# Altium PCB pocker_ shield_3.pcbdoc
Units mm, origin at the board's own origin, x right, y up, seen from the top; angles counter-clockwise.
Board outline 45 x 90.2 mm, 2 copper layers (Top Layer, Bottom Layer); 7 components, 17 nets, 66 pads, 43 vias.
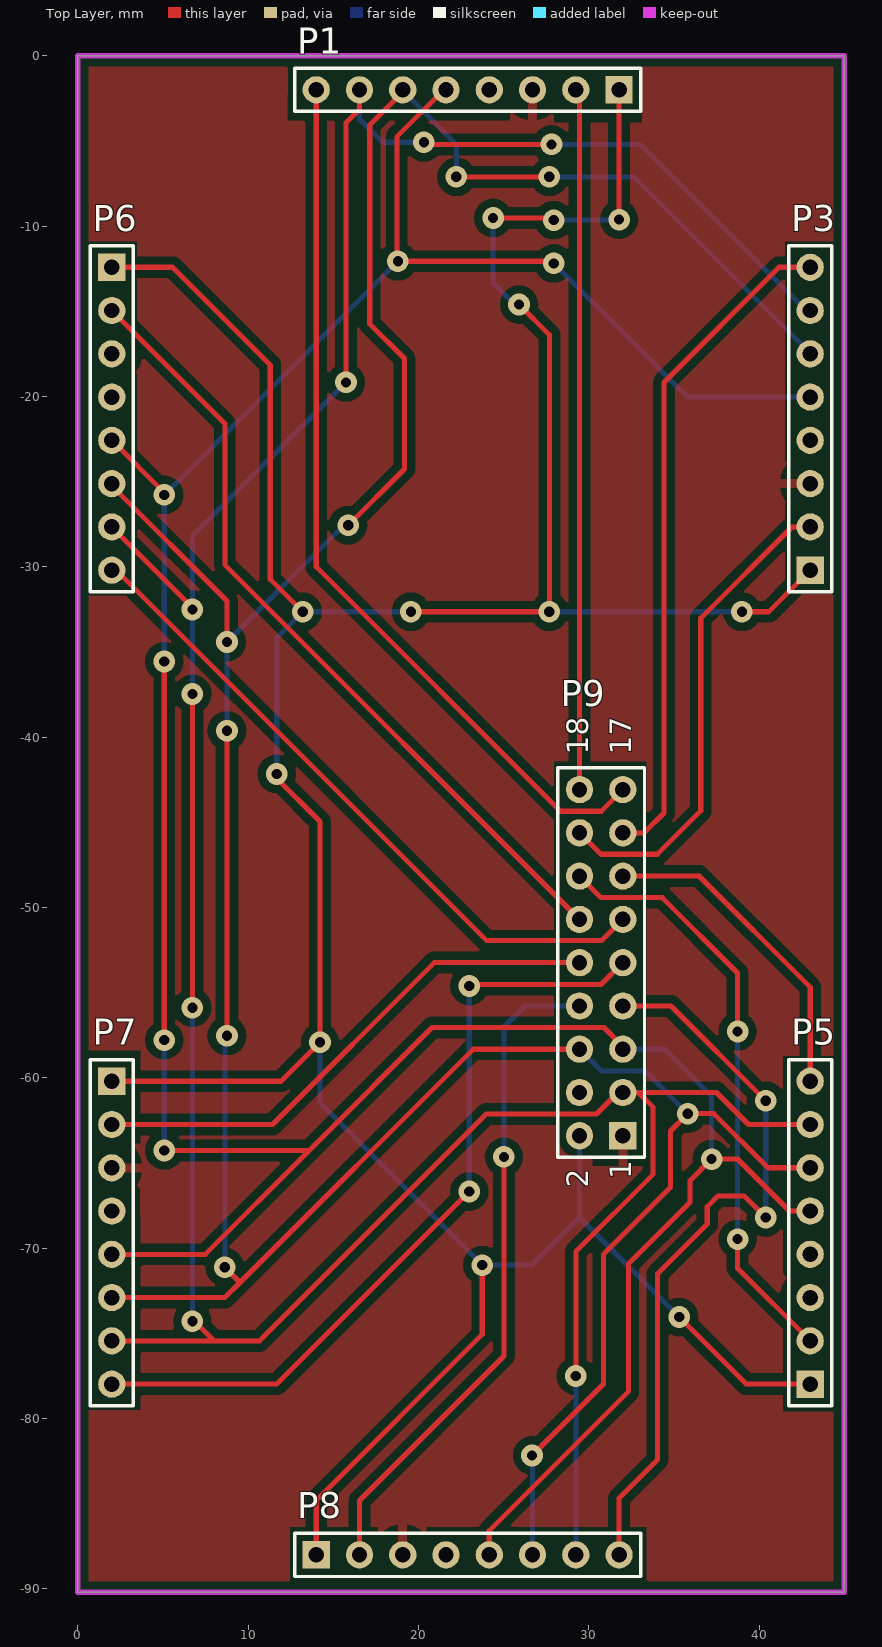
[diagram p0: Top Layer view]
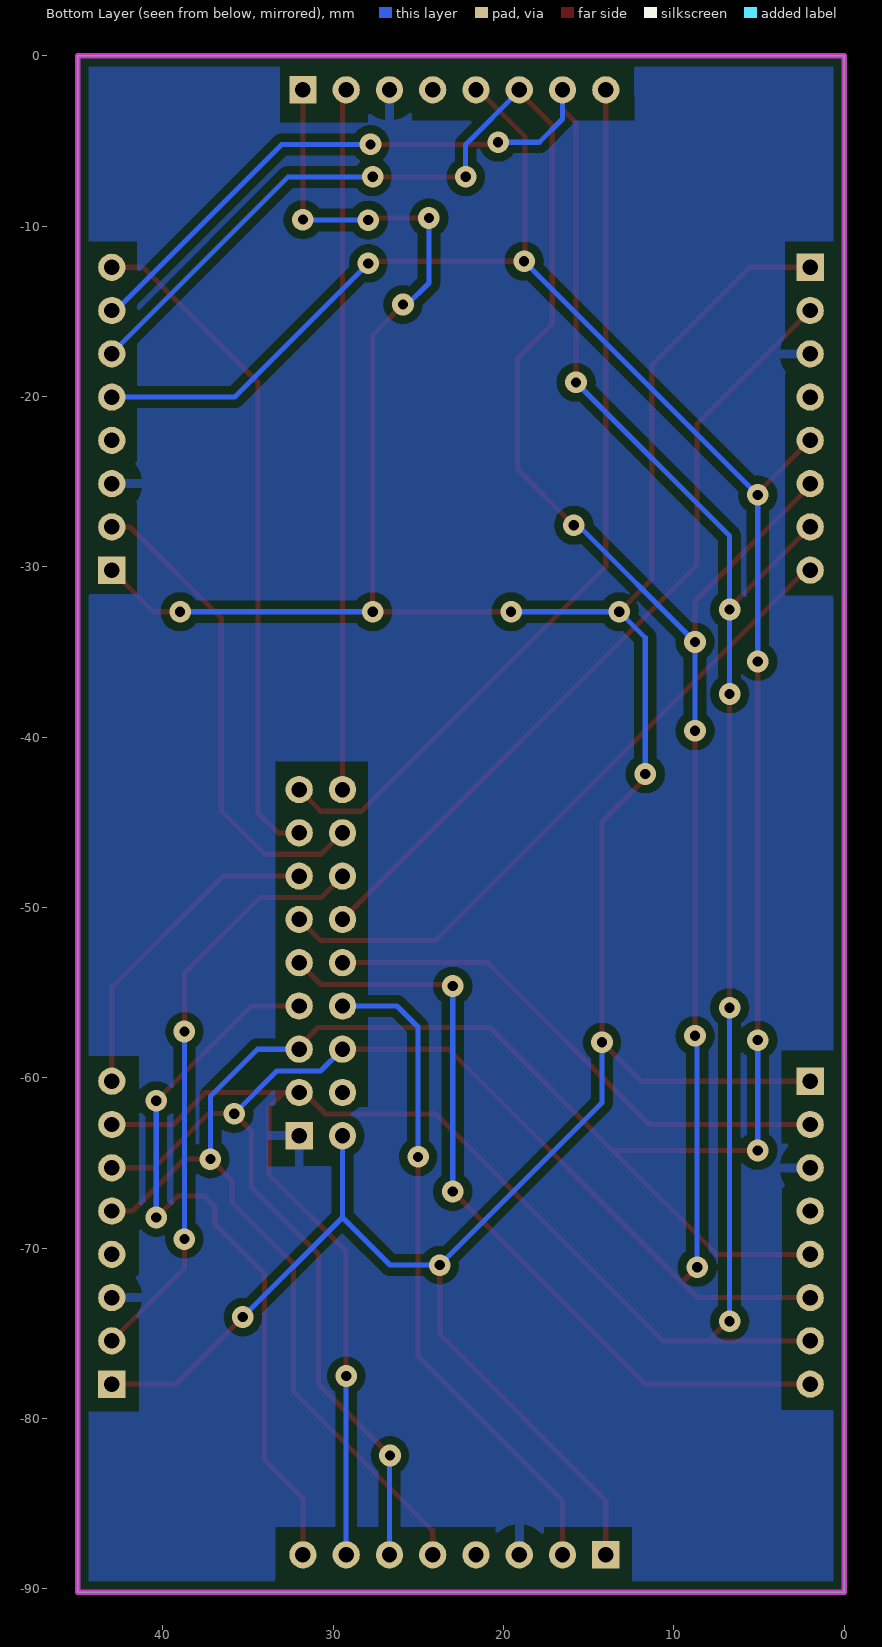
[diagram p1: Bottom Layer view, seen from below]

## Layer stack, top to bottom
Top Solder: solder mask 0.0102, Solder Resist, Dk 3.5
Top Layer: signal copper 0.0356
Dielectric 1: dielectric 0.32, FR-4, Dk 4.8
Bottom Layer: signal copper 0.0356
Bottom Solder: solder mask 0.0102, Solder Resist, Dk 3.5

## Board outline
0,-90.2 0,0 45,0 45,-90.2

## Design rules (kind name [scope] priority, off if disabled: settings)
Clearance [All] p1: gap=0.3
PlaneClearance [All] p1: clearance=0.5
PlaneConnect [All] p1: planeconnectstyle=Relief reliefexpansion=0.508 reliefentries=4 reliefconductorwidth=0.5 reliefairgap=0.5
PolygonConnect [All] p1: connectstyle=Relief reliefconductorwidth=0.5 reliefentries=4 polygonreliefangle="90 Angle" airgapwidth=1
RoutingVias [All] p1: holewidth=0.711 width=1.27 viastyle="Through Hole" minholewidth=0.711 minwidth=1.27 maxholewidth=0.711 maxwidth=1.27
SolderMaskExpansion [All] p1: expansion=0.102
Width [All] p1: maxlimit=0.5 minlimit=0.3 preferedwidth=0.3
27 further rules are at their usual default settings.

## Components (designator, comment, footprint, x,y, rotation, side; value= is the part's Value field where it differs from the comment)
P1 "Header 8" HDR1X8 31.78,-2 r180 top locked
P3 "Header 8" HDR1X8 43,-30.2 r90 top locked
P5 "Header 8" HDR1X8 43,-77.98 r90 top locked
P6 "Header 8" HDR1X8 2,-12.42 r270 top locked
P7 "Header 8" HDR1X8 2,-60.2 r270 top locked
P8 "Header 8" HDR1X8 14,-88 r0 top locked
P9 "Header 9X2" HDR2X9 32,-63.4 r90 top locked

## Footprints (in the part's own frame and the unit in brackets; to place one, negate y for a bottom-side part, rotate by r counter-clockwise, add the part's x,y. Pads: shape width x height; smd on the part's side, far side on the other; paste and mask are expansions set on the pad)
HDR1X8 [mm] "Connector; Header; 8 Position"
  rect 1.6x1.6 hole 0.9: 1(0,0)
  round 1.6 hole 0.9: 2(2.54,0) 3(5.08,0) 4(7.62,0) 5(10.16,0) 6(12.7,0) 7(15.24,0) 8(17.78,0)
  silkscreen extent -1.27,-1.27 19.05,1.27
HDR2X9 [mm] "Connector; Header; 9x2 Position"
  rect 1.6x1.6 hole 0.9: 1(0,0)
  round 1.6 hole 0.9: 2(0,2.54) 3(2.54,0) 4(2.54,2.54) 5(5.08,0) 6(5.08,2.54) 7(7.62,0) 8(7.62,2.54) 9(10.16,0) 10(10.16,2.54) 11(12.7,0) 12(12.7,2.54) 13(15.24,0) 14(15.24,2.54) 15(17.78,0) 16(17.78,2.54) 17(20.32,0) 18(20.32,2.54)
  silkscreen extent -1.27,-1.27 21.59,3.81

## Part data
P1 P3 P5 P6 P7 P8: "Header, 8-Pin"
P9: "Header, 9-Pin, Dual row"

## Via types
v1: diameter 1.27, hole 0.6, Top Layer to Bottom Layer, 43 vias

## Nets (pads, with @x,y where several pads share a name; then routed paths per layer and width w, separated by ;. In a path a pad name is that pad's centre, name@x,y a point inside that pad or via, vN(x,y) a via of type N, cw(c..) or ccw(c..) an arc to the next point about the centre after c; other vN are vias at no path point)
CS1: P8.8 P9.7 | length 44.3
  Top Layer w0.3: P8.8 31.78,-84.679 34.036,-82.423 34.036,-71.501 36.957,-68.58 36.957,-67.564 37.592,-66.929 39.116,-66.929 v1(40.386,-68.199) ; P9.7 34.825,-55.78 v1(40.386,-61.341)
  Bottom Layer w0.3: v1(40.386,-68.199) v1(40.386,-61.341)
CS2: P7.8 P9.9 | length 47.4
  Top Layer w0.3: P7.8 11.682,-77.98 v1(22.987,-66.675) ; v1(22.987,-54.61) 22.987,-54.525 30.715,-54.525 P9.9
  Bottom Layer w0.3: v1(22.987,-66.675) v1(22.987,-54.61)
CS3: P6.8 P9.11 | length 39.5
  Top Layer w0.3: P6.8 2.26,-30.2 24.01,-51.95 30.75,-51.95 P9.11
CS4: P5.8 P9.13 | length 19.2
  Top Layer w0.3: P9.13 36.476,-48.16 43,-54.684 P5.8
CS5: P3.8 P9.15 | length 39.6
  Top Layer w0.3: P9.15 33.247,-45.62 34.417,-44.45 34.417,-19.177 41.174,-12.42 P3.8
CS6: P1.8 P9.17 | length 52.5
  Top Layer w0.3: P1.8 14,-30.002 28.348,-44.35 30.73,-44.35 P9.17
GND: P1.3 P3.3 P5.3 P6.3 P7.3 P8.3 P9.1
MISO: P1.5 P3.5 P5.5 P6.5 P7.5 P8.5 P9.5 | length 191.6
  Top Layer w0.3: P7.5 7.491,-70.36 13.589,-64.262 ; P6.5 2.006,-22.58 v1@5.08,-25.654 ; v1(5.08,-64.262) 13.589,-64.262 ; v1(5.08,-57.785) v1(5.08,-35.56) ; v1@18.732,-12.002 18.732,-4.763 21.495,-2 P1.5 ; v1(18.796,-12.065) 28.067,-12.065 v1(27.94,-12.192) ; P8.5 24.16,-86.584 32.322,-78.422 32.322,-70.929 35.941,-67.31 35.941,-66.04 v1(37.211,-64.77) 38.735,-64.77 41.785,-67.82 P5.5 ; P9.5 32,-58.162 30.888,-57.05 20.801,-57.05 13.589,-64.262
  Bottom Layer w0.3: v1(5.08,-64.262) v1(5.08,-57.785) ; v1(5.08,-35.56) v1(5.08,-25.781) v1(18.796,-12.065) ; v1(27.94,-12.192) 35.788,-20.04 P3.5 ; P9.5 34.444,-58.32 37.211,-61.087 v1(37.211,-64.77)
MOSI: P1.6 P3.6 P5.6 P6.6 P7.6 P8.6 P9.6 | length 199.6
  Top Layer w0.3: P7.6 8.634,-72.9 9.525,-72.009 ; P6.6 2,-25.241 8.763,-32.004 8.763,-34.163 v1@8.89,-34.29 ; v1@8.634,-71.122 v1(8.636,-71.12) 9.525,-72.009 ; v1(8.763,-57.531) v1(8.763,-39.624) ; v1(15.875,-27.559) 19.177,-24.257 19.177,-17.78 17.145,-15.748 17.145,-4.064 19.08,-2.129 P1.6 ; v1@22.098,-7.112 v1@27.178,-7.112 ; v1(26.67,-82.169) 30.861,-77.978 30.861,-70.358 34.798,-66.421 34.798,-63.119 v1(35.814,-62.103) 37.338,-62.103 40.515,-65.28 P5.6 ; P9.6 23.214,-58.32 9.525,-72.009
  Bottom Layer w0.3: v1(8.636,-71.12) v1@8.636,-57.531 ; v1(8.763,-39.624) v1(8.763,-34.417) 15.621,-27.559 v1(15.875,-27.559) ; P1.6 19.08,-2.062 22.225,-5.207 v1(22.225,-7.112) ; v1(26.67,-82.169) 26.7,-82.199 P8.6 ; v1@27.686,-7.239 27.813,-7.112 32.639,-7.112 43,-17.473 P3.6 ; P9.6 30.74,-59.6 33.311,-59.6 v1(35.814,-62.103) v1@36.068,-62.103
  other v1: 27.686,-7.112
RESET1: P8.2 P9.8 | length 39.4
  Top Layer w0.3: P8.2 16.54,-84.806 25.019,-76.327 v1(25.019,-64.643)
  Bottom Layer w0.3: v1(25.019,-64.643) 25.019,-57.023 26.262,-55.78 P9.8
RESET2: P7.2 P9.10 | length 31.4
  Top Layer w0.3: P7.2 11.428,-62.74 20.928,-53.24 P9.10
RESET3: P6.2 P9.12 | length 47.1
  Top Layer w0.3: P6.2 8.636,-21.596 8.636,-29.876 P9.12
RESET4: P5.2 P9.14 | length 35.6
  Top Layer w0.3: P9.14 30.725,-49.425 34.312,-49.425 38.735,-53.848 v1@38.735,-57.658 ; v1@38.735,-69.215 38.735,-71.175 P5.2
  Bottom Layer w0.3: v1(38.735,-69.469) v1(38.735,-57.277)
RESET5: P3.2 P9.16 | length 28.6
  Top Layer w0.3: P9.16 30.715,-46.875 34.024,-46.875 36.576,-44.323 36.576,-33.02 41.936,-27.66 P3.2
RESET6: P1.2 P9.18 | length 40.9
  Top Layer w0.3: P9.18 P1.2@29.46,-2.22
SCK: P1.7 P3.7 P5.7 P6.7 P7.7 P8.7 P9.3 | length 194.6
  Top Layer w0.3: P7.7 8.001,-75.44 ; P6.7 6.731,-32.391 v1(6.731,-32.512) ; v1(6.731,-74.295) 6.856,-74.295 8.001,-75.44 ; v1(6.731,-55.88) v1(6.731,-37.465) ; v1(15.748,-19.177) 15.748,-3.937 16.54,-3.145 P1.7 ; v1@20.447,-5.207 v1(27.813,-5.207) ; v1(29.24,-77.5) 29.24,-70.201 33.782,-65.659 33.782,-61.722 32.92,-60.86 ; P5.7 39.372,-62.74 37.492,-60.86 32.92,-60.86 ; 8.001,-75.44 10.666,-75.44 23.981,-62.125 30.458,-62.125 31.723,-60.86 P9.3 32.92,-60.86
  Bottom Layer w0.3: v1(6.731,-74.295) v1(6.731,-55.88) ; v1(6.731,-37.465) v1(6.731,-32.512) 6.731,-28.194 v1(15.748,-19.177) ; P1.7 16.54,-3.713 17.907,-5.08 v1@20.447,-5.08 ; v1@28.067,-5.207 33.02,-5.207 42.773,-14.96 P3.7 ; P8.7 v1(29.24,-77.5)
  other v1: 20.32,-5.08
VDD+3.3V: P1.1 P3.1 P5.1 P6.1 P7.1 P8.1 P9.2 | length 204.6
  Top Layer w0.3: P7.1 4.193,-60.2 4.195,-60.198 11.938,-60.198 v1(14.224,-57.912) 14.224,-44.958 11.557,-42.291 v1(11.684,-42.164) ; P6.1 5.562,-12.42 11.303,-18.161 11.303,-30.734 v1(13.208,-32.639) ; P8.1 14,-84.806 23.749,-75.057 v1(23.749,-70.993) ; v1(19.558,-32.639) v1(27.686,-32.639) 27.686,-16.383 v1(25.908,-14.605) ; v1(24.384,-9.525) v1@27.813,-9.525 ; v1(31.78,-9.622) P1.1 ; v1(35.306,-74.041) 39.243,-77.978 41.021,-77.978 41.023,-77.98 P5.1 ; v1(38.989,-32.639) 40.561,-32.639 P3.1
  Bottom Layer w0.3: v1(11.684,-42.164) 11.684,-34.163 v1(13.208,-32.639) v1(19.558,-32.639) ; v1(14.224,-57.912) 14.224,-61.468 v1(23.749,-70.993) 26.662,-70.993 29.46,-68.195 ; v1@24.384,-9.779 24.384,-13.335 25.654,-14.605 v1(25.908,-14.605) ; v1(27.686,-32.639) v1(38.989,-32.639) ; v1(27.94,-9.652) 31.75,-9.652 v1(31.78,-9.622) ; P9.2 29.46,-68.195 ; v1(35.306,-74.041) 29.46,-68.195
pads on no net: P1.4 P3.4 P5.4 P6.4 P7.4 P8.4 P9.4

## Polygon pours and split planes (outlines as drawn)
GND on Bottom Layer "Bottom Layer-No Net" (solid, pour order 8): 0,0 45,0 45,-90.2 0,-90.2
GND on Top Layer "Bottom Layer-No Net" (solid, pour order 10): 0,0 45,0 45,-90.2 0,-90.2

## Keep-outs
Keep-Out Layer:
  the board outline again, w0.3

## Other copper
Multi-Layer:
  pour cut-out: 27.94,-41.402 33.401,-41.402 33.401,-61.722 27.94,-61.722
  pour cut-out: 12.446,-86.36 17.653,-86.36 17.653,-89.789 12.446,-89.789
  pour cut-out: 0.508,-58.381 3.708,-58.381 3.708,-63.881 0.508,-63.881
  pour cut-out: 27.94,-0.508 33.147,-0.508 33.147,-3.937 27.94,-3.937
  pour cut-out: 12.319,-0.381 25.4,-0.508 25.4,-3.81 12.3,-3.821
  pour cut-out: 41.5,-10.9 44.5,-10.9 44.5,-23.9 41.6,-23.9 41.5,-23.8
  pour cut-out: 41.5,-26.3 44.5,-26.3 44.5,-31.57 44.361,-31.709 44.251,-31.6 41.5,-31.6
  pour cut-out: 41.4,-58.7 44.5,-58.7 44.5,-71.8 41.7,-71.8 41.4,-71.5
  pour cut-out: 41.4,-74.1 44.6,-74.1 44.6,-79.6 41.4,-79.6
  pour cut-out: 20.447,-86.36 33.401,-86.36 33.4,-89.9 33.3,-89.8 20.447,-89.789
  pour cut-out: 0.381,-66.421 3.683,-66.421 3.7,-79.5 0.5,-79.5 0.4,-79.6
  pour cut-out: 0.5,-18.7 3.5,-18.7 3.5,-31.7 0.5,-31.7
  pour cut-out: 0.5,-10.9 3.5,-10.9 3.5,-16.3 0.5,-16.3

## Text inside footprints (layer, text, board x,y; h text height)
P9: Top Overlay "18" at 29.968,-41.048 h1.27 r90; Top Overlay "17" at 32.508,-41.048 h1.27 r90; Top Overlay "1" at 32.508,-65.94 h1.27 r90; Top Overlay "2" at 29.968,-66.448 h1.27 r90